# Altium PCB NCP3063.PcbDoc
Units mil, origin at the board's own origin, x right, y up, seen from the top; angles counter-clockwise.
Board outline 2160.03 x 560.03 mil, 2 copper layers (Top Layer, Bottom Layer); 17 components, 16 nets, 44 pads, 5 vias.
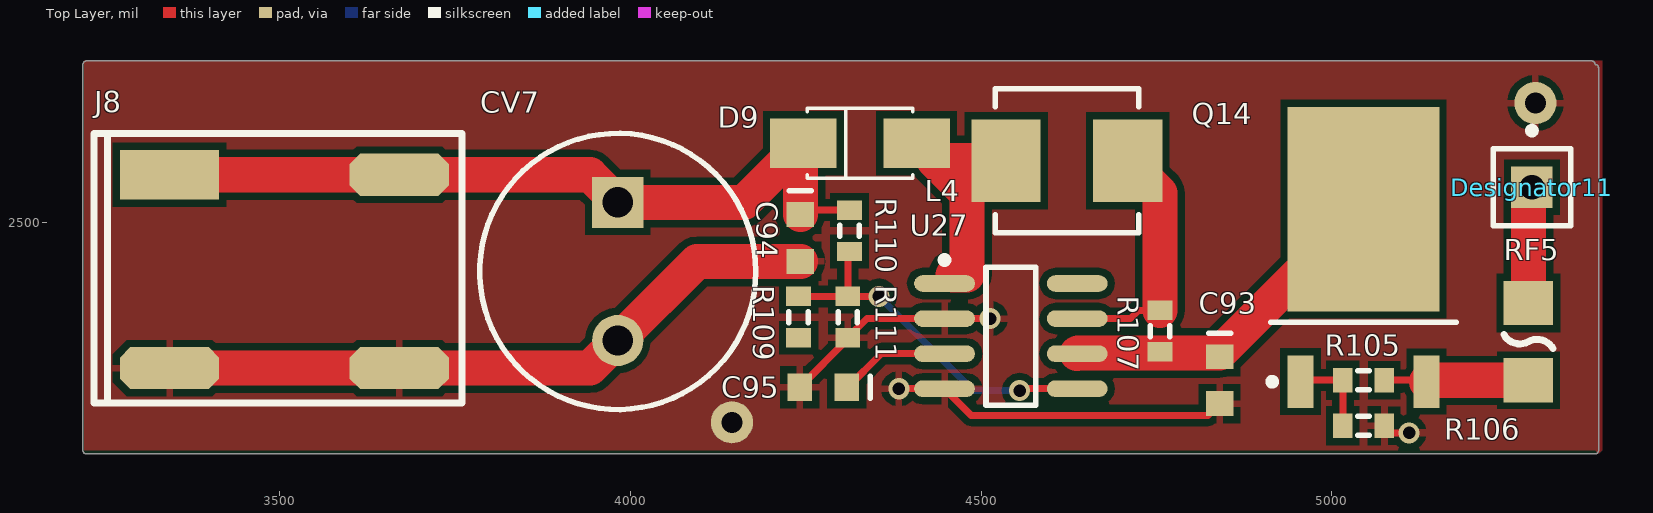
[diagram p0: Top Layer view]
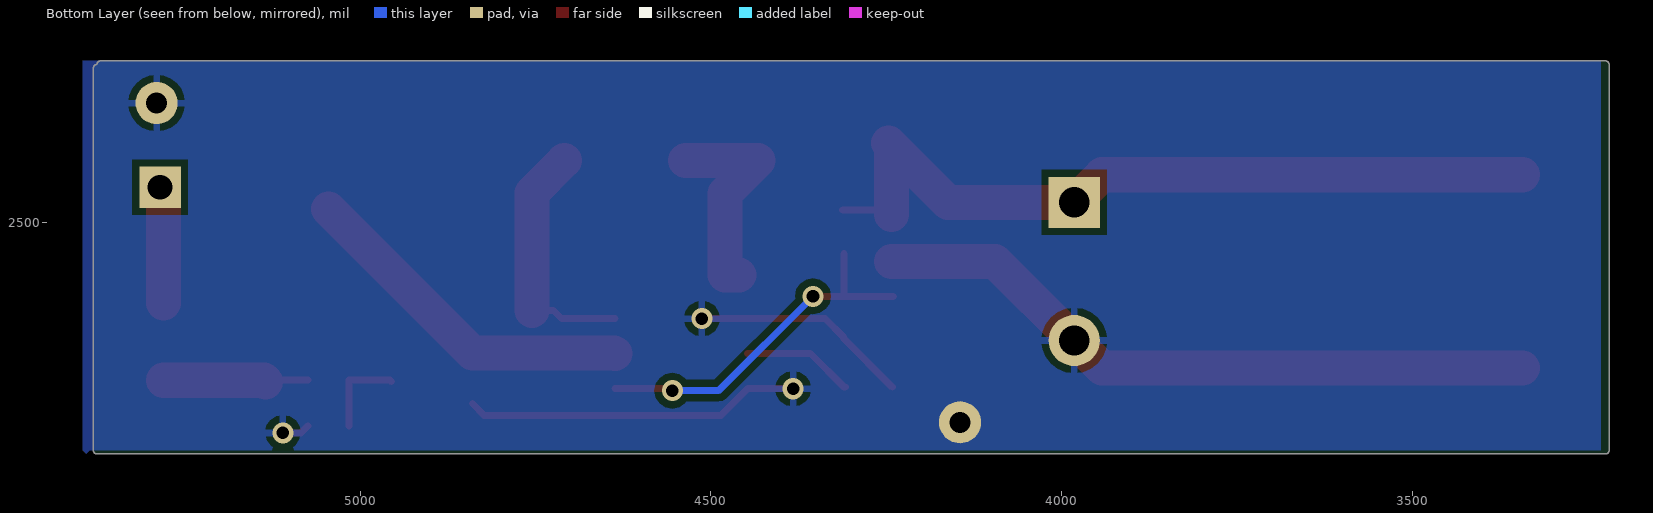
[diagram p1: Bottom Layer view, seen from below]
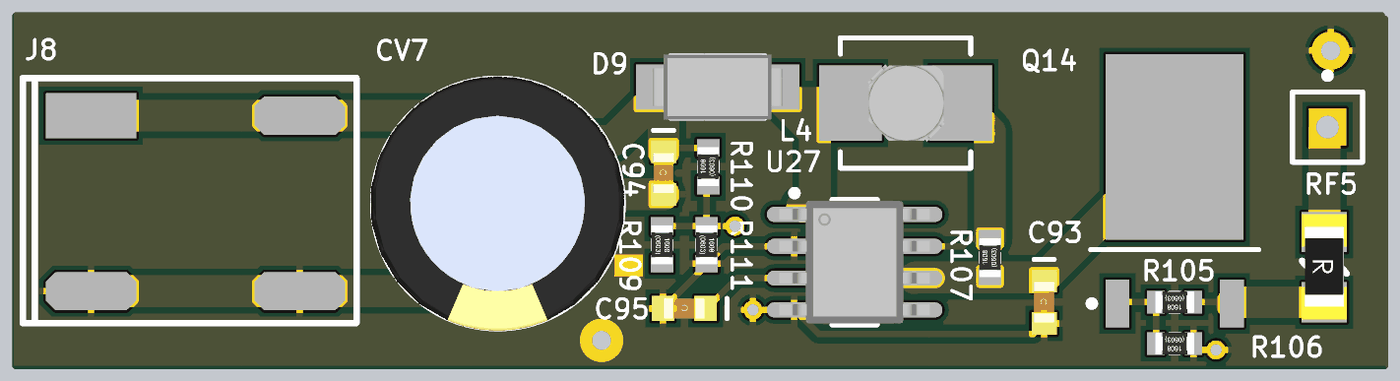
[diagram p2: 3D render of the assembled board from above, using the file's embedded part models]

## Layer stack, top to bottom
Top Layer: signal copper 1.4
Dielectric: dielectric 12.6, FR-4, Dk 4.8
Bottom Layer: signal copper 1.4

## Board outline
3219.99,2175 ccw(c3225,2175) 3225,2169.99 5375,2169.99 ccw(c5375,2175) 5380.02,2175 5380.02,2720 ccw(c5375,2720) 5375.02,2725.01 ccw(c5370,2725) 5370,2730.01 3225,2730.01 ccw(c3225,2725) 3219.99,2725

## Design rules (kind name [scope] priority, off if disabled: settings)
Clearance [All] p1: gap=10
PolygonConnect [All] p1: connectstyle=Relief reliefconductorwidth=10 reliefentries=4 polygonreliefangle="90 Angle" airgapwidth=10
RoomDefinition NCP3063_LCD背光 [InComponentClass('NCP3063_LCD背光')] p1: confinementstyle=ConfineIn formatcopy=TRUE lockcomponents=FALSE outline 3222.2,2175 5385,2175 5385,2730 3222.2,2730
RoutingVias [All] p1: holewidth=28 width=50 viastyle="Through Hole" minholewidth=18 minwidth=10 maxholewidth=28 maxwidth=50
SolderMaskExpansion [All] p1: expansion=4
Width [All] p1: maxlimit=100 minlimit=10 preferedwidth=10
28 further rules are at their usual default settings.

## Classes and differential pairs
component class NCP3063_LCD背光: C93 C94 C95 CV7 D9 J8 L4 Q14 R105 R107 R109 R110 R111 RF5 U27

## Components (designator, comment, footprint, x,y, rotation, side; value= is the part's Value field where it differs from the comment)
C93 "C1608X7R1H104K" 1608[0603]C 4840,2275 r270 top
C94 "C1608X7R1H104K" 1608[0603]C 4242.44,2477.83 r270 top
C95 "C1608X7R1H222K" 1608[0603]C 4275,2265 r180 top
CV7 "EEU-FM1H271" CAPPR5-10x20/H1.1 3982.2,2430 r270 top
D9 "SS14HE3/5AT" DO-214AC/SMA 4327.44,2612.83 r180 top
Designator11 "Comment" PIN1 5285,2550 r0 top
J8 "JST" JST 3507.2,2430 r90 top
L4 "CDRH5D28RH125NP-470MC" INDP5050X28N 4622.44,2587.83 r180 top
Q14 "NTD2955G" TO-252AA_N 5045,2450 r90 top
R105 "CRCW0603100KFKEA" 1608[0603]R 5045,2275 r180 top
R106 "CRCW0603100KFKEA" 1608[0603]R 5045,2210 r180 top (schematic designator R105)
R107 "CRCW06032R00FKEA" 1608[0603]R 4755,2345 r90 top
R109 "CRCW060351K0FKEA" 1608[0603]R 4240,2365 r270 top
R110 "CRCW0603100KFKEA" 1608[0603]R 4312.44,2487.83 r90 top
R111 "CRCW06034K70FKEA" 1608[0603]R 4310,2365 r270 top
RF5 "1812L050/30PR" 2012[0805]F 5280,2330 r270 top
U27 "NCV3063DR2G" SOIC8_N 4542.44,2337.83 r0 top

## Footprints (in the part's own frame and the unit in brackets; to place one, negate y for a bottom-side part, rotate by r counter-clockwise, add the part's x,y. Pads: shape width x height; smd on the part's side, far side on the other; paste and mask are expansions set on the pad)
1608[0603]C [mm]
  rect 0.9x1 smd: 1(-0.85,0) 2(0.85,0)
  silkscreen extent -1.7,-0.4 -1.7,0.4, body extent -1.3,-0.5 1.3,0.5, height 0.89
1608[0603]R [mm] "Chip Resistor, Body 1.6x0.8mm, IPC Medium Density"
  rect 0.7x0.9 smd: 1(-0.75,0) 2(0.75,0)
  silkscreen extent -0.2,-0.35 0.2,0.35, body extent -0.77,-0.42 0.78,0.43, height 0.45
2012[0805]F [mm]
  rect 1.6x1.8 smd: 1(-1.4,0) 2(1.4,0)
  silkscreen extent -0.25,-0.89 0.25,0.89, body extent -2.12,-0.9 2.08,0.9, height 0.63
CAPPR5-10x20/H1.1 [mm] "Capacitor, Electrolytic, Radial; Body 10 x 20 mm (Dia.xH typ); Pin Spacing 5 mm (typ)"
  rect 1.85x1.85 hole 1.1: 1(-2.5,0)
  round 1.85 hole 1.1: 2(2.5,0)
  silkscreen extent -5,-5 5,5, body extent -5.08,-5.08 5.08,5.05, height 20.32
DO-214AC/SMA [mm] "DO-214-AC/SMA; 2 C-Bend Leads; Body 5 x 2.7 mm, inc. leads (LxW)"
  rect 2.4x1.8 smd: 1(-2.05,0) 2(2.05,0)
  silkscreen extent -1.91,-1.27 1.91,1.27, body extent -2.6,-1.3 2.6,1.3, height 2.38
INDP5050X28N [mm]
  rect 2.5x3 smd: 1(-2.2,0) 2(2.2,0)
  silkscreen extent -2.6,-2.6 2.6,2.6, body extent -1.56,-1.53 1.51,1.54, height 2
JST [mm]
  oct 1.524x3.6 smd: 1(3.5,-4.161) 2(-3.5,-4.161) 2(-3.5,4.161)
  rect 1.8x3.6 smd: 1(3.5,4.161)
  silkscreen extent -4.77,-6.43 5,6.89, body extent -4.84,-6.41 4.99,6.95, height 1.27
PIN1 [mm] "Generic Antenna; 1 Lead"
  rect 1.5x1.5 hole 0.9: 1(0,0)
  silkscreen extent -1.4,-1.4 1.4,2.17
SOIC8_N [mm] "SOIC, 8-Leads, Body 4.9x3.9mm, Pitch 1.27mm, IPC Medium Density"
  oval 2.2x0.6 smd: 1(-2.4,1.905) 2(-2.4,0.635) 3(-2.4,-0.635) 4(-2.4,-1.905) 5(2.4,-1.905) 6(2.4,-0.635) 7(2.4,0.635) 8(2.4,1.905)
  silkscreen extent -2.52,-2.5 0.9,2.88, body extent -3,-2.45 3,2.45, height 1.7
TO-252AA_N [mm] "D-PAK, 4-Leads, Body 6.1x6.5mm, Pitch 2.28mm, Lead Span 9.9mm, IPC Medium Density"
  rect 1.9x0.95 smd: 1(-4.5,2.28) 3(-4.5,-2.28)
  rect 7.4x5.5 smd: 4(1.75,0)
  silkscreen extent -4.62,-3.35 -2.35,3.43, body extent -2.25,-3.37 4.1,3.37, height 2.38

## Part data
C93 C94: library part CAP, "多层陶瓷电容器MLCC - SMD/SMT 0603 0.1uF 50volts X7R 10%"
C95: library part CAP, "多层陶瓷电容器MLCC - SMD/SMT 0603 2200pF 50volts X7R 10%"
CV7: library part ELECTRO1, "插针 铝质电解电容器 - 带引线 270UF 50V ELECT FM RADIAL"
D9: library part 10BQ060, "肖特基二极管与整流器 40 Volt 1.0 Amp 40 Amp IFSM"
J8: library part CON2, "CON"
L4: library part Inductor, "固定电感器 SMD Power Inductor"
Q14: library part PMOS-2, "PMOSFET -60V -12A P-Channel"
R105 R106 R110: library part RES, "厚膜电阻器 - SMD 1/10watt 100Kohms 1%"
R107: library part RES, "厚膜电阻器 - SMD 1/10watt 2ohms 1%"
R109: library part RES, "厚膜电阻器 - SMD 1/10watt 51Kohms 1%"
R111: library part RES, "厚膜电阻器 - SMD 1/10watt 4.7Kohms 1%"
RF5: library part FUSE1, "可复位保险丝 PTC 30V POLY SURF MOUNT 1812 .500A"
U27: library part MC33063AD, "直流/直流开关转换器 1.5 A DCDC SW REG"

## Free pads (board coordinates)
  round 60 hole 30: 0(5290,2670) 1(4145,2215)

## Via types
v1: diameter 30, hole 18, Top Layer to Bottom Layer, 5 vias

## Nets (pads, with @x,y where several pads share a name; then routed paths per layer and width w, separated by ;. In a path a pad name is that pad's centre, name@x,y a point inside that pad or via, vN(x,y) a via of type N, cw(c..) or ccw(c..) an arc to the next point about the centre after c; other vN are vias at no path point)
LCD_PWREN: 
NetC93_1: C93.1 Q14.4 R107.1 U27.6 | length 493.4
  Top Layer w50: U27.6 4638,2313.9 4840,2313.9 Q14.4
NetC94_1: C94.1 CV7.1 D9.2 J8.1 R110.2 | length 1115.8
  Top Layer w10: C94.1@4248.51,2517.36 R110.2
  Top Layer w50: J8.1@3343.39,2567.8 3671.02,2567.8 3942.83,2567.8 CV7.1 4162.32,2528.43 D9.2@4242.44,2608.54 ; C94.1 D9.2@4242.44,2608.54 ; D9.2 D9.2@4242.44,2608.54
NetC95_1: C95.1 U27.3 | length 159.3
  Top Layer w10: C95.1 4310,2265 4357.83,2312.83 U27.3
NetD9_1: D9.1 L4.2 U27.1 | length 304.9
  Top Layer w50: 4460,2425 4480,2425 4480,2540.98 4433.15,2587.83 L4.2
NetL4_1: L4.1 R107.2 U27.7 | length 355.2
  Top Layer w10: U27.7 4712.83,2362.83 4724.53,2374.53 R107.2
  Top Layer w50: L4.1 4755,2541.89 R107.2
NetQ14_1: Q14.1 R105.2 R106.2 | length 126.1
  Top Layer w10: Q14.1 4957.4,2275 R105.2 R106.2
NetQ14_3: Q14.3 R105.1 RF5.2 | length 204.2
  Top Layer w10: R105.1 Q14.3@5132.6,2275
  Top Layer w50: Q14.3 5136.81,2274.88 RF5.2
NetR106_2: 
NetR108_2: 
NetR109_1: R109.1 R110.1 R111.1 U27.5 | length 515.2
  Top Layer w10: R109.1 R111.1 ; R110.1@4310,2455.86 R111.1 ; v1(4354.53,2394.53) R111.1 ; v1(4555,2260) 4557.83,2262.83 U27.5
  Bottom Layer w10: v1(4354.53,2394.53) 4489.06,2260 v1(4555,2260)
NetR109_2: R109.2
SGND: C93.2 C94.2 C95.2 CV7.2 J8.2 pad.0 pad.1 R106.1 R111.2 U27.2 U27.4 | length 1794.4
  Top Layer w10: C95.2 4310,2333.46 R111.2 4337.36,2362.83 U27.2 v1(4512.83,2362.83) ; v1(4382.83,2262.83) U27.4 4485.79,2225 4823.46,2225 C93.2 ; R106.1 5084.53,2200 v1(5110,2200)
  Top Layer w50: J8.2@3343.39,2292.2 3671.02,2292.2 3942.83,2292.2 CV7.2 4095,2444.37 C94.2
TOUT1/GPB1: 
VDD3V3: 
VDD24V: Designator11.1 RF5.1 | length 167
  Top Layer w50: RF5.1 5280,2545 Designator11.1
pads on no net: U27.8

## Polygon pours and split planes (outlines as drawn)
SGND on Bottom Layer "Top Layer-No Net" (solid, pour order 2): 3232.2,2730 3232.2,2175 5385,2175 5390,2170 5395,2175 5395,2730
SGND on Top Layer "Top Layer-No Net" (solid, pour order 2): 3222.2,2730 3222.2,2175 5375,2175 5380,2170 5385,2175 5385,2730

## Silkscreen, mask and mechanical layers (free items; w line width, h text height)
Top Solder:
  rectangle: 4165,2315 4210,2350
Mechanical 1:
  lines w10: 3225,2175 5375,2175 5375,2720 5370,2725 3225,2725 3225,2175